# Altium PCB TIDA_010057.PcbDoc (part 8 of 9)
Units mil, origin at the board's own origin, x right, y up, seen from the top; angles counter-clockwise.
Board outline 1771.65 x 3543.31 mil, 12 copper layers (Top Layer, GND1, Signal Layer 1, GND2, POWER1, POWER2, GND4, POWER3, GND6, Signal Layer 2, GND7, Bottom Layer), stack 62.79 mil thick; 593 components, 374 nets, 1805 pads, 1029 vias.
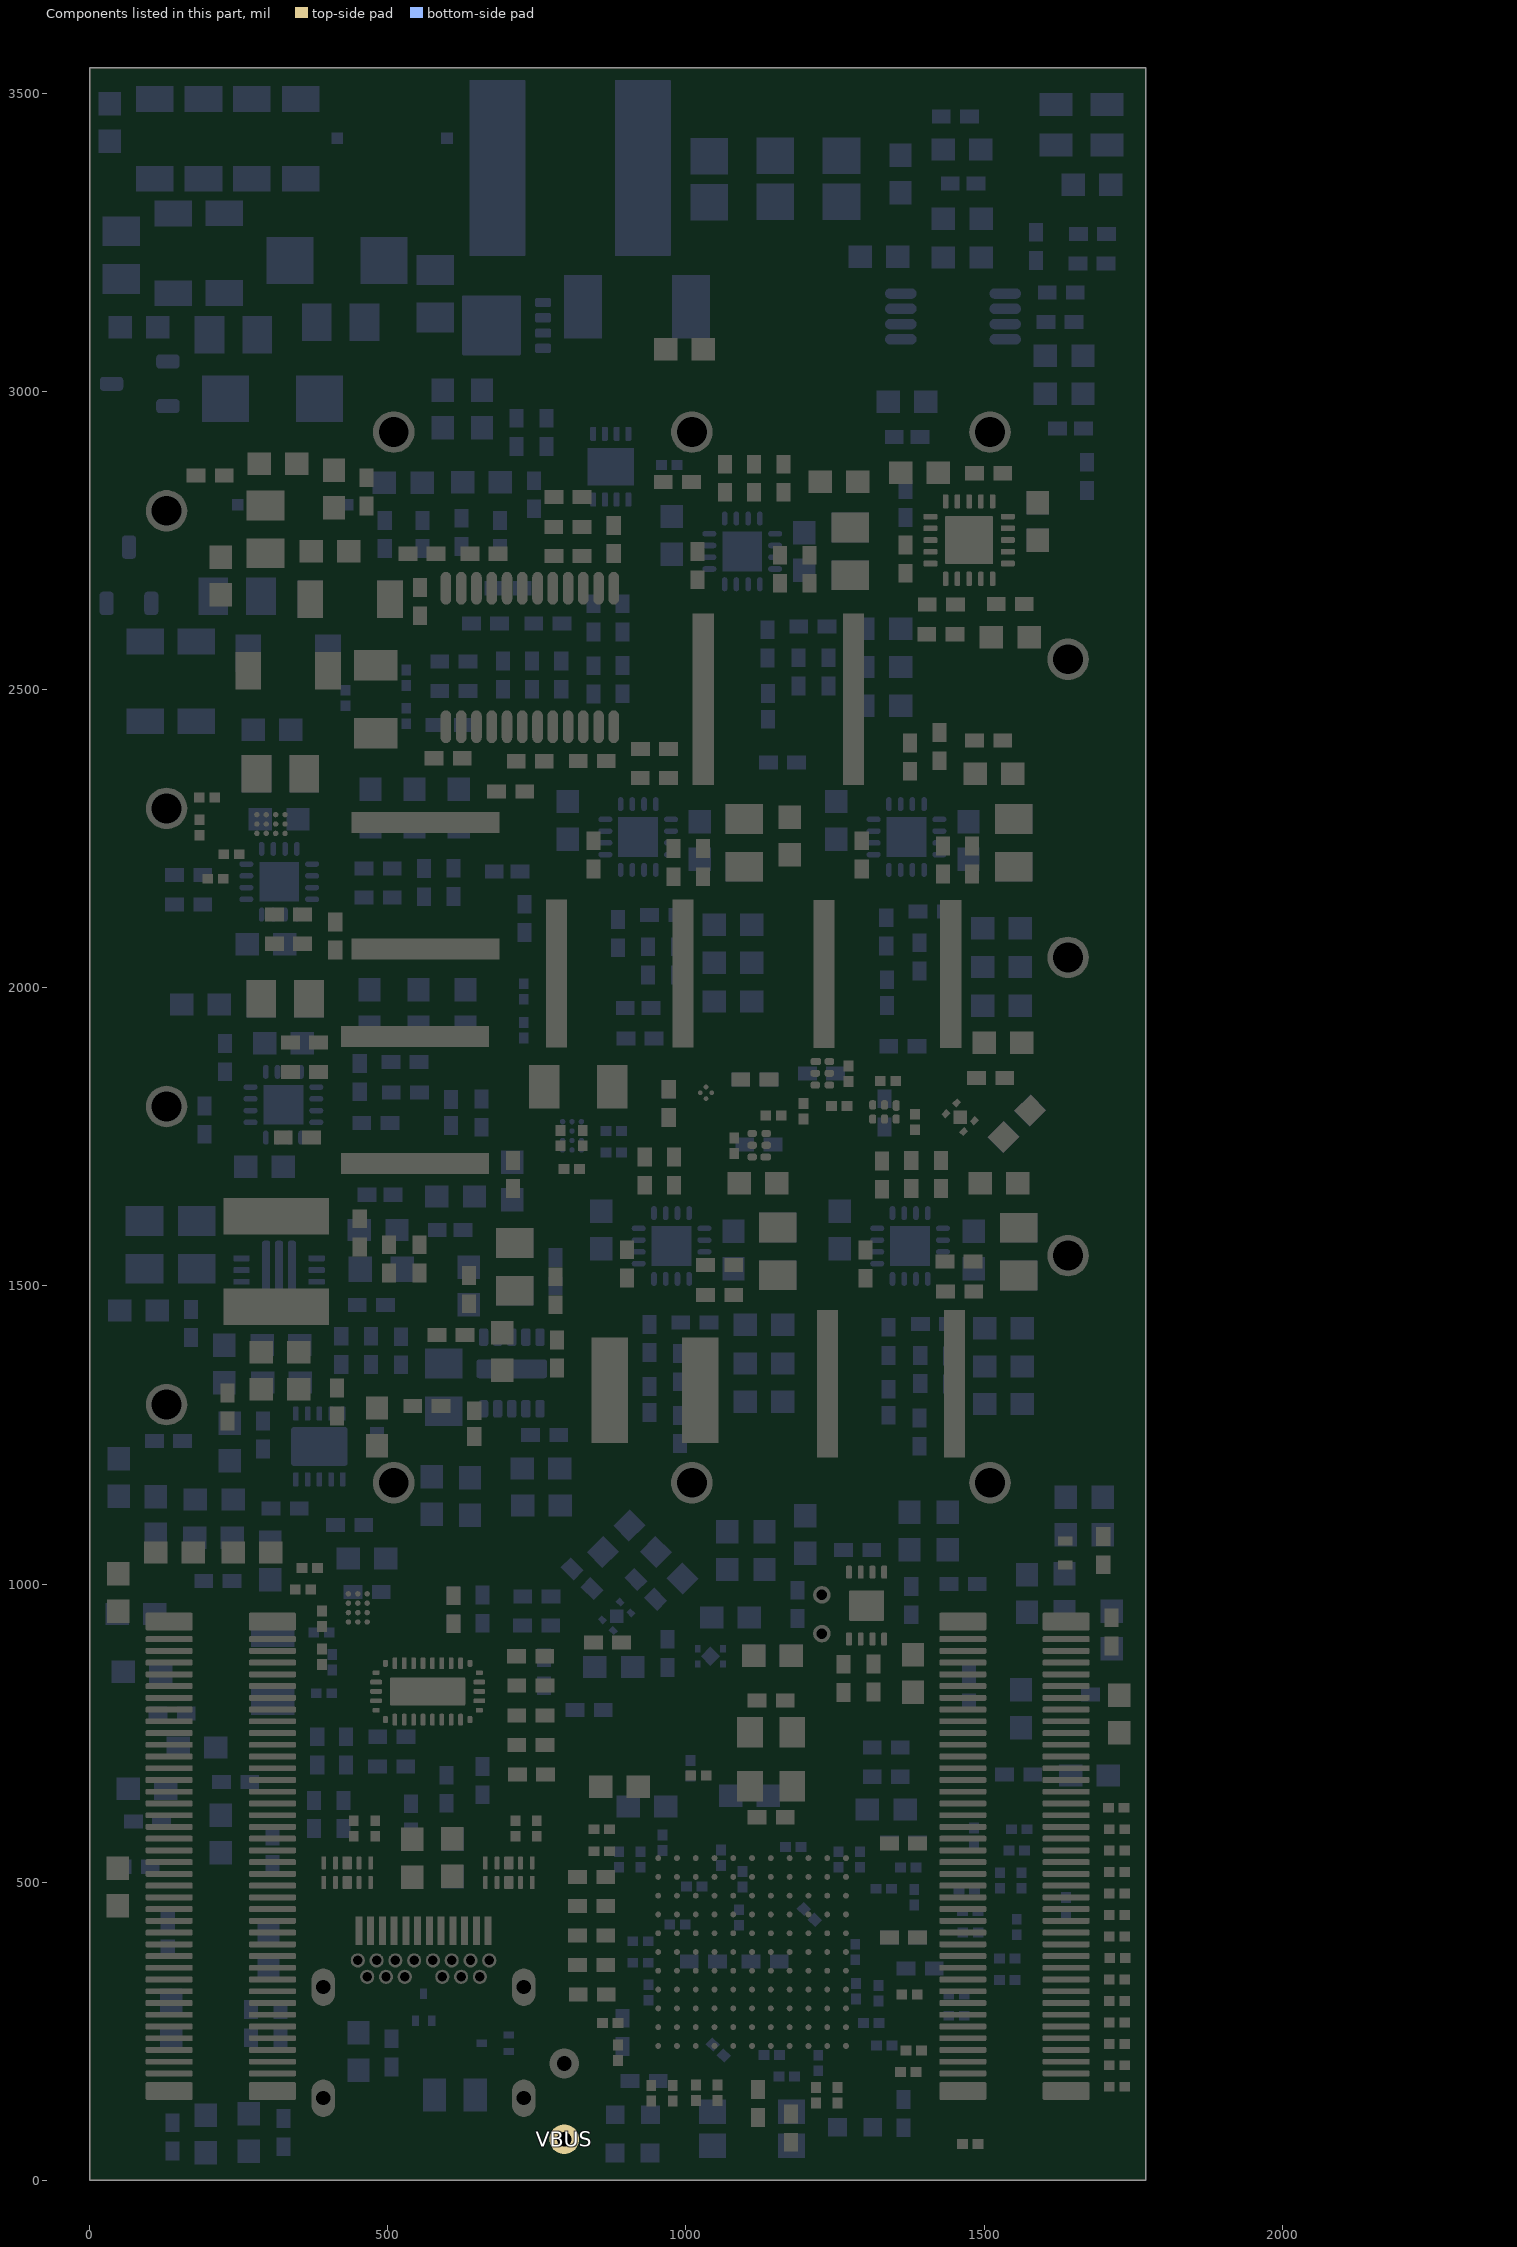
[diagram p16: the components of this part, seen from the top]

## Polygon pours and split planes (outlines as drawn) (continued)
NetC188_2 on Top Layer "Top Layer-No Net" (solid, remove dead copper, pour order 1956): 657,1280 657,1329 664,1336 754,1336 760,1342 760,1376 756,1380 641,1380 627,1394 566,1394 561,1389 561,1372 573,1360 573,1287 580,1280
NetC187_1 on Top Layer "Top Layer-No Net" (solid, remove dead copper, pour order 1972): 27 vertices, not listed, extent 614,1403 793,1531
GND_SIG on Top Layer "Top Layer-No Net" (solid, remove dead copper, pour order 2070): 1739,1073 1770,1042 1770,53 1722,5 46,5 4,47 4,1031 46,1073
GND_SIG on Bottom Layer "Top Layer-No Net" (solid, remove dead copper, pour order 2084): 480,2754 701,2754 703,2752 703,2719 689,2705 480,2705 476,2709 476,2752
NetC35_1 on Bottom Layer "Top Layer-No Net" (solid, remove dead copper, pour order 1976): 367,2709 368,2708 455.86,2708 457,2709.14 457,2998 413.61,3041.39 413.61,3156.39 410,3160 339,3160 333,3154 333,2935 367,2901
HVGND on Bottom Layer "Top Layer-No Net" (solid, remove dead copper, pour order 1974): 479,3321 479,3528 18,3528 15,3525 15,3464 389,3464 402,3451 402,3321
HVP on Bottom Layer "Top Layer-No Net" (solid, remove dead copper, pour order 1966): 1431,954 1437,960 1467,960 1480,973 1549,973 1664,973 1666,971 1666,926 1661,921 1586.84,921 1578.84,929 1519,929 1511,921 1435,921 1431,925
PGND on Bottom Layer "Top Layer-No Net" (solid, remove dead copper, pour order 1910): 45 vertices, not listed, extent 295,1760 701,2022
NetC227_1 on Bottom Layer "Top Layer-No Net" (solid, remove dead copper, pour order 1908): 649,1954 654,1949 654,1899 653,1898 436,1898 435,1899 435,1948 441,1954
NetC79_1 on Bottom Layer "Top Layer-No Net" (solid, remove dead copper, pour order 1906): 280,1708 270,1718 270,1766 274,1770 276.44,1770 276.44,1779 251,1779 241,1769 241,1682 280,1682
NetC79_2 on Bottom Layer "Top Layer-No Net" (solid, remove dead copper, pour order 1904): 21 vertices, not listed, extent 291,1681 657,1759
PGND on Bottom Layer "Top Layer-No Net" (solid, remove dead copper, pour order 1898): 39 vertices, not listed, extent 286,2137 694.5,2392
NetC59_2 on Bottom Layer "Top Layer-No Net" (solid, remove dead copper, pour order 1890): 18 vertices, not listed, extent 288,2043 670.02,2134
PGND on Bottom Layer "Top Layer-No Net" (solid, remove dead copper, pour order 1868): 50 vertices, not listed, extent 1065.5,2372 1380.5,2763
NetC80_2 on Bottom Layer "Top Layer-No Net" (solid, remove dead copper, pour order 1866): 22 vertices, not listed, extent 937,2397.38 1092.19,2765
NetC96_1 on Bottom Layer "Top Layer-No Net" (solid, remove dead copper, pour order 1836): 210,393 200,403 186,417 186,443 201,458 311,458 319,450 319,393 279,393
NetC25_2 on Bottom Layer "Top Layer-No Net" (solid, remove dead copper, pour order 1558): 440,3051 434,3057 434,3152 440,3158 629,3158 637,3166 637,3523 731,3523 732,3522 732,3226 726,3220 726,3054 723,3051
HVGND on Bottom Layer "Top Layer-No Net" (solid, remove dead copper, pour order 1554): 19 vertices, not listed, extent 916.41,3015 1387,3346
GND_SIG on Bottom Layer "Bottom Layer-No Net 3" (solid, pour order 1522): 17 vertices, not listed, extent 86,514 184,680
PGND on Bottom Layer "Bottom Layer-No Net 1" (solid, remove dead copper, pour order 1518): 128,111 147,130 326,130 338,118 338,88 160,88 152,80 126,80 125,79 125,108
GND_SIG on Bottom Layer "Bottom Layer-No Net 1" (solid, remove dead copper, pour order 1516): 124,67 349,67 355,61 355,16 351,12 124,12 122,14 122,65
NetC198_1 on Bottom Layer "Bottom Layer-No Net 1" (solid, remove dead copper, pour order 1458): 92,27 98,33 98,136 156,194 156,258 118,258 118,236.73 34,152.73 34,38 45,27
1V2_DVDD on Bottom Layer "Bottom Layer-No Net 1" (solid, remove dead copper, pour order 1456): 69,338 73,334 89,334 94,329 94,297 109,282 118,282 170,282 173,285 173,382 151,404 71,404 69,402
NetC217_1 on Bottom Layer "Bottom Layer-No Net" (solid, remove dead copper, pour order 300): 28 vertices, not listed, extent 485,358.09 630,535
PGND on Bottom Layer "Bottom Layer-No Net" (solid, remove dead copper, pour order 38): 529,204 558.74,174.26 597.85,174.26 598.86,173.25 598.86,115.73 592.13,109.01 530,110 428,110 424,114 424,201 427,204 483,204
VBUS_USB on Bottom Layer "Top Layer-No Net" (solid, remove dead copper, pour order 390): 18 vertices, not listed, extent 185,890 382,952
VBUS on Bottom Layer "Top Layer-No Net" (solid, remove dead copper, pour order 394): 376.96,848.03 351.02,848.03 347.06,851.31 347.06,865.21 343.59,869 212,869 209,866 209,851 235.59,824.41 235.59,773.4 241.89,767.1 386.87,767.1 386.87,838.12
VBUS on Bottom Layer "Bottom Layer-No Net 1" (solid, remove dead copper, pour order 984): 827.01,896.01 842,911 853,911 869.01,894.99 869.01,841 867.01,839 829.01,839 827.01,841
VCC_3.3V_CDCE on Bottom Layer "Bottom Layer-No Net 1" (solid, remove dead copper, pour order 986): 20 vertices, not listed, extent 877,980 1017,1125.02
VCC_3.3V on Bottom Layer "Bottom Layer-No Net 1" (solid, remove dead copper, pour order 988): 852,1090 790.5,1028.5 811,1008 814,1008 845,1039 848,1039 860,1027 887.5,1054.5
VCC_INT_1V on Bottom Layer "Bottom Layer-No Net 1" (solid, remove dead copper, pour order 1408): 23 vertices, not listed, extent 100,471 347,570
VCCO_2V5 on Bottom Layer "Bottom Layer-No Net 1" (solid, remove dead copper, pour order 1416): 17 vertices, not listed, extent 191,611 342,745
1.8V_AVDD_VCA on Bottom Layer "Bottom Layer-No Net 1" (solid, remove dead copper, pour order 1440): 20 vertices, not listed, extent 1448,726 1678,819
1V8_VDD_RX on Bottom Layer "Bottom Layer-No Net 1" (solid, remove dead copper, pour order 1442): 1688,703.15 1744.85,703.15 1749,699 1749,664 1744,659 1688,659
1V8_AVDD_IO_TX on Bottom Layer "Bottom Layer-No Net 1" (solid, remove dead copper, pour order 1448): 211.24,779 203.24,771 146,771 146,822 135,833 101,833 99,835 99,872 153,872 215,810 215,782 212,779
VBUS_USB on Bottom Layer "Bottom Layer-No Net" (solid, remove dead copper, pour order 1510): 577,596.5 579.46,594.05 579.46,557.78 572.85,552 517,552 508,561 508,592 512.5,596.5
NetC39_2 on Bottom Layer "Top Layer-No Net" (solid, remove dead copper, pour order 1844): 1219,1212.97 1219.98,1211.99 1300,1211.98 1300,1484.35 1284,1500.35 1284,1544 1292,1552 1331,1552 1333,1554 1333,1600 1332,1601 1311,1601 1293,1583 1240,1583 1219,1562
PGND on Bottom Layer "Top Layer-No Net" (solid, remove dead copper, pour order 1846): 45 vertices, not listed, extent 1326,1235 1600,1599.62
NetC54_2 on Bottom Layer "Top Layer-No Net" (solid, remove dead copper, pour order 1848): 19 vertices, not listed, extent 819,1211.98 933,1600
PGND on Bottom Layer "Top Layer-No Net" (solid, remove dead copper, pour order 1850): 36 vertices, not listed, extent 927,1212 1187,1600
NetC102_2 on Bottom Layer "Top Layer-No Net" (solid, remove dead copper, pour order 1852): 1213,1899.97 1213.98,1898.99 1286,1898.98 1286,2179.35 1278,2187.35 1278,2231 1286,2239 1325,2239 1326,2240 1326,2285 1324,2287 1304,2287 1287,2270 1234,2270 1213,2249
PGND on Bottom Layer "Top Layer-No Net" (solid, remove dead copper, pour order 1854): 52 vertices, not listed, extent 1323,1767 1604,2285
NetC176_2 on Bottom Layer "Top Layer-No Net" (solid, remove dead copper, pour order 1858): 763,1899.97 763.98,1898.99 843,1898.98 843,2172.35 828,2187.35 828,2231 836,2239 875,2239 877,2241 877,2287 876,2288 855,2288 837,2270 784,2270 763,2249
PGND on Bottom Layer "Top Layer-No Net" (solid, remove dead copper, pour order 1860): 53 vertices, not listed, extent 874,1759 1170,2284
NetC117_1 on Bottom Layer "Top Layer-No Net" (solid, remove dead copper, pour order 1942): 18 vertices, not listed, extent 61,1422 267,1554
PGND on Bottom Layer "Top Layer-No Net" (solid, remove dead copper, pour order 1948): 334,1420 334,1456 345,1456 345,1424 348,1421 372,1421 373,1420 373,1319 334,1319
NetC181_1 on Bottom Layer "Top Layer-No Net" (solid, remove dead copper, pour order 1958): 420,1297 438,1315 521,1315 527,1309 527,1283.35 521.65,1278 434,1278 430,1274 421,1274 420,1275
"ALTERNATE HV INPUT" on Bottom Layer "Top Layer-No Net" (solid, remove dead copper, pour order 1960): 370,1298 311,1298 303,1290 216,1290 214,1288 214,1251 216,1249 259,1249 268,1258 305,1258 321,1274 370,1274
PGND on Bottom Layer "Top Layer-No Net" (solid, remove dead copper, pour order 1964): 35 vertices, not listed, extent 91,1059 657,1315
NetC129_1 on Bottom Layer "NONET_L-01_P-001" (solid, remove dead copper, pour order 328): 370,380 740,380 750,370 750,80 740,70 370,70 360,80 360,370
GND_SIG on Bottom Layer "Top Layer-No Net" (solid, remove dead copper, pour order 2072): 1739,1073 1770,1042 1770,53 1722,5 46,5 4,47 4,1031 46,1073
GND_A7 on GND1 "Top Layer-No Net" (solid, remove dead copper, pour order 2042): 174,1318.16 181.16,1311 209,1311 213,1315 213,1357.16 222.84,1367 392,1367 402,1357 534,1357 552,1375 552,1615 544,1623 225,1623 174,1572
TX_5V on GND1 "Top Layer-No Net" (solid, remove dead copper, pour order 2038): 370,1016 356,1030 237,1030 228,1021 228,713 239,702 360,702 370,712
TX_-5V on GND1 "Top Layer-No Net" (solid, remove dead copper, pour order 2040): 18 vertices, not listed, extent 15,771 505,1155
GND_SIG on GND1 "Top Layer-No Net" (solid, remove dead copper, pour order 2054): 1716,3543 1771,3488 1771,60 1711,0 76,0 0,76 0,3489 54,3543
NetC96_1 on POWER1 "Top Layer-No Net" (solid, remove dead copper, pour order 1982): 1143,1287 1172,1258 1172,1081.61 1152.39,1062 1065,1062 1055,1072 1055,1221 1015,1261 1015,1434 1029,1448 1138,1448 1143,1443
NetC46_1 on POWER1 "Top Layer-No Net" (solid, remove dead copper, pour order 1980): 1554,1141 1571,1124 1737,1124 1754,1141 1754,1452 1741,1465 1467,1465 1460,1458 1460,1220 1465,1215 1533,1215 1554,1194
VBUS on POWER1 "Top Layer-No Net" (solid, remove dead copper, pour order 1990): 53 vertices, not listed, extent 208.7,416 1770.37,3338
VBUS_USB on POWER1 "Bottom Layer-No Net 1" (solid, remove dead copper, pour order 1992): 22 vertices, not listed, extent 10,5 981,1256
VCC_FX3_AVDD on POWER1 "Top Layer-No Net" (solid, remove dead copper, pour order 1994): 30 vertices, not listed, extent 1126,147 1657,1103
VCC_FX3_TXVDDQ on POWER1 "Top Layer-No Net" (solid, remove dead copper, pour order 1996): 31 vertices, not listed, extent 994,11 1756,1104
VTX_5V on POWER1 "Top Layer-No Net" (solid, remove dead copper, pour order 2008): 22 vertices, not listed, extent 0,1272 1660,3530.48
NetL43_1 on POWER2 "Top Layer-No Net" (solid, remove dead copper, pour order 2010): 27,1048 16,1059 16,2744 20,2748 86,2748 93,2741 93,1275 133,1235 133,1057 124,1048
VDD_FPGA on POWER2 "Top Layer-No Net" (solid, remove dead copper, pour order 2014): 21 vertices, not listed, extent 130,1272 1184,2664
NetC227_1 on POWER2 "Top Layer-No Net" (solid, remove dead copper, pour order 2016): 200,772 200,801 229.03,830.03 253,830.03 253,1907 296,1950 653,1950 713,1890 713,583 657,527 205,527 176,556 176,748
3.3V on POWER2 "Top Layer-No Net" (solid, remove dead copper, pour order 2018): 21 vertices, not listed, extent 1470,684 1756.36,1774
1V8_VDD_RX on POWER2 "Top Layer-No Net" (solid, remove dead copper, pour order 2020): 53 vertices, not listed, extent 8,3 1755,2580
VCC_FX3_VIO on POWER2 "Top Layer-No Net" (solid, remove dead copper, pour order 2022): 988,122 948,162 842,162 811,193 811,196 811,1040 811.8,1040.8 811.8,1209.8 847,1245 1274,1245 1286,1233 1286,608 1394,500 1394,207 1309,122
PGND on POWER2 "Top Layer-No Net" (solid, remove dead copper, pour order 2080): 1716,3543 1771,3488 1771,60 1711,0 76,0 0,76 0,3489 54,3543
PGND on POWER3 "Top Layer-No Net" (solid, remove dead copper, pour order 2096): 1716,3543 1771,3488 1771,60 1711,0 76,0 0,76 0,3489 54,3543
VCC_FX3_RXVDDQ on POWER3 "Top Layer-No Net" (solid, remove dead copper, pour order 2028): 22 vertices, not listed, extent 902,482 1396,1102
VCC_FX3_CVDDQ on POWER3 "Top Layer-No Net" (solid, remove dead copper, pour order 2030): 33 vertices, not listed, extent 799,0 1299,1047
NetC96_1 on POWER3 "Top Layer-No Net" (solid, remove dead copper, pour order 2034): 24 vertices, not listed, extent 176,75 1189,1460
NetC198_1 on POWER3 "Top Layer-No Net" (solid, remove dead copper, pour order 2044): 26 vertices, not listed, extent 19,15 1132,1887
NetC83_1 on POWER3 "Top Layer-No Net" (solid, remove dead copper, pour order 2046): 1375,2444 1397,2466 1397,2588 1600,2791 1612,2803 1612,2841.54 1606.54,2847 1348,2847 1205,2704 1205,2461 1222,2444
NetC61_1 on POWER3 "Top Layer-No Net" (solid, remove dead copper, pour order 2036): 632,2315 89,2315 15,2241 15,726 34,707 306,707 334,735 334,2020 388,2074 633,2074 655,2096 655,2292
VCC_FX3_DVDD on POWER3 "Top Layer-No Net" (solid, remove dead copper, pour order 2032): 36 vertices, not listed, extent 925,13 1751,1100
NetL42_1 on POWER3 "Top Layer-No Net" (solid, remove dead copper, pour order 2024): 22 vertices, not listed, extent 12.67,986 1757,3191
"ALTERNATE HV INPUT" on GND2 "Top Layer-No Net" (solid, remove dead copper, pour order 2050): 17 vertices, not listed, extent 194,1176 1741,3524
AVSS on GND2 "Top Layer-No Net" (solid, remove dead copper, pour order 2052): 313,564 339.27,590.27 397.38,590.27 423.65,564 1682,564 1756,638 1756,1054 1719,1091 56,1091 14,1049 14,583 33,564
PGND on GND2 "Top Layer-No Net" (solid, remove dead copper, pour order 2062): 1716,3543 1771,3488 1771,60 1711,0 76,0 0,76 0,3489 54,3543
PGND on GND4 "Top Layer-No Net" (solid, remove dead copper, pour order 2098): 646,2896 587,2837 587,268 613,242 706,242 726,222 726,33 759,0 792,0 1711,0 1771,60 1771,2896
HVGND on GND4 "Top Layer-No Net" (solid, remove dead copper, pour order 2088): 21 vertices, not listed, extent 0,16 1769,3530
PGND on GND6 "Top Layer-No Net" (solid, remove dead copper, pour order 2064): 1716,3543 1771,3488 1771,60 1711,0 76,0 0,76 0,3489 54,3543
GND_SIG on GND7 "Top Layer-No Net" (solid, remove dead copper, pour order 2056): 0,3506 36,3542 1732,3542 1772,3502 1771,2939 1771,2885 1771,60 1711,0 76,0 0,76
GND_SIG on Signal Layer 1 "Top Layer-No Net" (solid, remove dead copper, pour order 2094): 1716,3543 1771,3488 1771,60 1711,0 76,0 0,76 0,3489 54,3543
GND_SIG on Signal Layer 2 "Top Layer-No Net" (solid, remove dead copper, pour order 2074): 1716,3543 1771,3488 1771,60 1711,0 76,0 0,76 0,3489 54,3543

## Keep-outs
Keep-Out Layer:
  the board outline again, w10

## Other copper
Top Layer:
  region net NetC72_1: 252,2742 264,2754 327,2754 327,2704 325,2702 202,2702 180,2724 180,2822 183,2825 206,2825 209,2822 209,2750 217,2742
  region net PGND: 194,2871 155,2871 150,2876 114,2876 107,2869 107,2786 108,2787 147,2787 150,2790 150,2838 159,2847 194,2847
  region net PGND: 331,2898 398,2898 404,2904 404,2956.19 414.81,2967 530,2967 546,2951 546,2904 518,2876 481.86,2876 474,2868.14 474,2840 451,2840 443,2848 387,2848 375,2860 331,2860
  region net "ALTERNATE HV INPUT": 599,1406 599,1464 578,1485 536,1485 528,1477 528,1443 565,1406
  region net NetC36_2: 245,2590 250,2595 284,2595 288,2591 288,2500 245,2500
  region net HVGND: 307,2899 304,2902 179,2902 174,2897 174,2885 178,2881 205,2881 209,2877 209,2853 215,2847 250,2847 263,2834 263,2783 329,2783 338,2774 397,2774 414,2757 414,2623 378,2587 378,2501 422,2501 422,2575 436,2589 505,2589 525,2609 525,2612 525,2684 499,2710 499,2812.73 488.73,2823 420,2823 417,2826 343,2826 335,2834 321,2834 309,2846 309,2897
  pour cut-out: 1205,127 1197,119 1196.48,119 1192,123.48 1192,127.14 1192,159 1205,172
  region net TX_-5V: 427,1057 432,1057 443,1046 443,1037 434,1028 423,1028 416,1035 416,1046
  region net VBUS: 220,865 247,865 252,860 252,843 248,839 223,839 214,848 214,862
  region net VDD_FPGA: 350,2460 327,2437 327,2430 349,2408 358,2408 364,2414 364,2454 358,2460
  pour cut-out: 1251.55,889.53 1251.55,891.27 1242.13,900.69 1233.37,891.93 1233.37,891.28 1235.27,891.28 1246.44,880.12 1251.44,885.12 1251.44,889.76
  pour cut-out: 502,848 630,848 635,843 635,795 629,789 502.69,789 495.53,796.16 495.53,842.53 500,847
  region net NetC227_1: 421.98,1936.02 434.97,1949 660,1949 670.02,1938.98 670.02,1849.41 670.01,1849.4 421.98,1849.4
  region net VBUS_USB: 520,606 558.27,606 563,601.27 563,555 560,552 522,552 517.35,556.65 517.35,603.35
  region net VCC_FX3_AVDD: 1633,1103 1654,1082 1654,1070 1648,1064 1623,1064 1619,1068 1619,1097 1625,1103
  region net VCC_FX3_TXVDDQ: 1679,1103 1717,1103 1719,1101 1719,1064 1718,1063 1679,1063 1678,1064 1678,1102
  region net VBUS: 443,2401 517,2401 517,2453 443,2453
  region net VTX_5V: 444,2567 443,2566 443,2515 517,2515 517,2567
  region net VBUS: 818,1753 818,1770 846,1770 846,1753
  region net AVSS: 97,794 171,794 173,792 173,767 171,765 76,765 71,770 71,788 77,794
  region net PGND: 1358,2762 1347,2773 1347,2837 1356,2846 1379,2846 1379,2882 1380,2883 1340,2883 1326,2869 1326,2757 1357,2726 1432,2726 1451,2707 1451,2664 1442,2655 1437,2655 1437,2631 1465,2631 1466,2632 1466,2652 1460,2658 1460,2708 1463,2711 1509,2711 1526,2728 1556,2728 1564,2720 1564,2667 1552,2655 1552,2611 1555,2608 1555,2570 1556,2569 1598,2569 1610,2581 1610,2771 1555,2771 1552,2774 1519,2774 1512,2781 1442,2781 1436,2775 1392.79,2775 1379.79,2762
  region net 1V8_VDD_RX: 1532,2550 1537,2545 1560,2545 1565,2540 1565,2507 1560,2502 1529,2502 1494,2502 1492,2504 1492,2653 1470,2675 1470,2697 1471,2698 1524,2698 1528,2702 1528,2715 1529,2716 1551,2716 1552,2715 1552,2679 1536,2663 1536,2611 1532,2607
  region net NetC83_1: 1470,2828 1545,2828 1552,2835 1609,2835 1609,2793 1560,2793 1552,2785 1530,2785 1528,2787 1528,2797 1521,2804 1470,2804
  region net NetC83_1: 1319.5,2340 1195.01,2340 1194.99,2629 1309,2629 1319.5,2618.5
  region net VBUS: 1245.5,2868 1192.5,2868 1189.5,2865 1189.5,2832 1191.5,2830 1245.5,2830
  region net NetC81_1: 1268.01,2821.5 1268.01,2868 1307.51,2868 1307.51,2747 1243.51,2747 1243.51,2797
  region net VCCO_2V5: 345,637.35 346,636.35 346,609 345,608 259,608 257,610 257,634.35 260,637.35
  region net 1V8_DVDD: 73,637 172,637 173,636 173,608.31 73,607.97
  region: 2310,15
  region: 2310,15
  region: 2310,15
  region: 2310,15
  region: 2310,15
  region: 2310,15
  region: 605.6,3319.76
  region: 605.6,3319.76
  region: 605.6,3319.76
  region net GND_SIG: 94.07,671.37 172.34,671.37 172.69,671.03 172.69,652.24 172.64,652.28 94.08,652.28 94.08,671.26 94.04,671.3
  region net GND_SIG: 267.3,671.37 345.57,671.37 345.92,671.03 345.92,652.24 345.87,652.28 267.31,652.28 267.31,671.26 267.27,671.3
  region net NetC41_1: 1526,1622.5 1536,1632.5 1536,1691.5 1537,1692.5 1576,1692.5 1577,1691.5 1577,1635.5 1590,1622.5 1590,1572.5 1526,1572.5
  region net VBUS: 1514,1691.5 1461,1691.5 1458,1688.5 1458,1655.5 1460,1653.5 1514,1653.5
  region net NetC46_1: 1381.41,1460.01 1505.99,1460.01 1521,1445 1521,1251 1481.98,1211.98 1381.41,1211.98
  region net NetC56_1: 1122,1622.5 1132,1632.5 1132,1691.5 1133,1692.5 1172,1692.5 1173,1691.5 1173,1635.5 1186,1622.5 1186,1572.5 1122,1572.5
  region net VDD_FPGA: 1110,1691.5 1057,1691.5 1054,1688.5 1054,1655.5 1056,1653.5 1110,1653.5
  region net NetC54_2: 902,1432 904,1430 904,1214 903,1213 838,1213 837,1214 837,1429 840,1432
  region net NetC96_1: 992,1432 1008,1448 1096,1448 1122,1422 1122,1276 1079,1233 992,1233 991,1234 991,1431
  region net NetC103_1: 1518,2308 1528,2318 1528,2377 1529,2378 1568,2378 1569,2377 1569,2321 1582,2308 1582,2258 1518,2258
  region net VBUS: 1506,2378 1453,2378 1450,2375 1450,2342 1452,2340 1506,2340
  region net NetC110_1: 1442,1782 1438,1778 1388,1827.89 1388,1872 1375.41,1884.59 1375.41,1898.98 1375.4,2147.02 1508.98,2147.02 1516,2140 1516,1933 1517.7,1931.3 1520,1929 1520,1889 1519,1888 1513,1888 1505,1880 1505,1839 1503,1837 1446.59,1837 1434,1824.41 1434,1799.65 1442,1791.65
  region net 3.3V: 1454,1766 1467.53,1766 1475.53,1758 1515,1758 1533,1776 1534,1776 1565,1745 1565,1732 1544,1711 1459,1711 1451,1719 1451,1763
  region net NetC132_1: 1072,1911 1062,1901 1014.03,1901 1012,1898.97 1012,1840 1038,1814 1038,1813 1035,1810 1028,1810 1024,1814 959,1814 958,1815 958,1868.4 926.41,1899.98 926.4,2148.02 1013.98,2148.02 1072,2090
  region net NetC196_1: 1066.5,2308 1191,2308 1193,2306 1193,2266 1192,2265 1132,2265 1131,2264 1131,2259 1130,2258 1066.5,2258
  region net VBUS: 1155,2243.5 1155,2190.5 1158,2187.5 1191,2187.5 1193,2189.5 1193,2243.5
  region net NetC198_1: 1106,1874 1108,1872 1108,1834 1038,1834 1035,1831 1032,1831 1029,1834 1029,1868 1035,1874
  region net NetL43_1: 23,1106 28,1111 66,1111 70,1107 70,998 27,998 23,1002
  region net AVSS: 267,872 348,872 348,848.66 267,848.66
  region net AVSS: 199,870 199,877 196,880 187,880 180,873 94,873 94,844 186,844 199,857
  region net AVSS: 259,795 244,780 244,774 253,765 346,765 346,795
  region net AVSS: 1508,862.25 1517.25,853 1591,853 1606,868 1650,868 1653,865 1653,832 1646,825 1498,825 1426,825 1425,826 1425,871 1427,873 1507,873 1508,872
  region net AVSS: 1677.08,826.31 1677.08,871.31 1676.08,872.31 1598.31,872.31 1596,870 1596,832 1601.69,826.31
  region net GND_SIG: 1729,974 1732,971 1732,932 1728,928 1696,928 1692,932 1692,971 1695,974
  region net GND_SIG: 483.03,962.97 474,972 464,972 462,970 462,952 465,949 466,949 473,949 477.97,953.97 479.52,953.97 483.03,957.48
  region net NetC120_1: 263,1394 217,1348 217,1307 219,1305 306,1305 308,1307 308,1408 265,1408 263,1406
  region net NetC181_1: 463,1315 554,1315 558,1311 558,1279 554,1275 463,1275
  region net "ALTERNATE HV INPUT": 219,1290 299,1290 302,1287 302,1261 298,1257 219,1257
  region net TX_-5V: 172,834 93,834 91,832 91,807.65 94,804.65 171.65,804.65 172,805
  region net 1V8_AVDD_IO_TX: 263.74,834 257.74,828 202,828 192,818 192,786 199,779 222,779 247,804 345,804 345,834
  region net TX_5V: 94,755 345,755 346,754 346,707 345,706 94,706
  region net 3.3V_AVDD: 1425,815 1688,815 1707,834 1746,834 1746,794.5 1709.5,794.5 1700,785 1425,785
  region net NetC208_2: 239,2679 172,2679 168,2675 168,2641 171,2638 239,2638
  region net NetC36_2: 351,2752 390,2752 393,2749 393,2621 348,2621 348,2749
  region net GND_SIG: 1337,1031 1337,943 1332,938 1319,938 1318,937 1318,897 1308,897 1308,935 1305,938 1273,938 1268,943 1268,1031
  region net PGND: 1042,1828 1041,1827 1041,1822 1048,1815 1048,1808 1039,1799 958,1799 956,1797 956,1769 958,1767 1058,1767 1065,1774 1065,1823 1060,1828
  region net PGND: 320,1698 306,1684 306,1681 344,1681 344,1683 329,1698
  pour cut-out: 182,692 251.12,692 257.51,685.61 257.51,529.97 248.54,521 203,521 182.45,541.55 182.45,685.61
  pour cut-out: 988.95,676.76 983.36,676.76 981.87,675.26 981.87,663.12 989.25,655.73 993.78,660.26 993.78,660.74 988.95,665.58
  text "'.Layer_Name'" at 612,-857 h60
GND1:
  pour cut-out: 1398.07,453.76 1389.24,444.93 1393.93,440.24 1394.93,440.24 1403.76,449.07
  pour cut-out: 1569.87,608.13 1566.32,604.59 1560.36,604.59 1560.36,598.08 1561.51,596.93 1567.1,596.93 1571.57,601.4
  pour cut-out: 471,613 470,612 470,568 471,567 487,567 488,568 488,612 487,613
  pour cut-out: 434,568 435,567 450,567 451,568 451,612 450,613 435,613 434,612
  pour cut-out: 706,613 705,612 705,568 706,567 722,567 723,568 723,612 722,613
  pour cut-out: 741,612 742,613 758,613 759,612 759,568 758,567 742,567 741,568
  pour cut-out: 15.29,907 15,901 21,907 24,907 85,907 92,914 92,1125 72,1145 25,1145 14.75,1155.25
  pour cut-out: 1414,958 1418,962 1503,962 1509,956 1509,909 1504,904 1423,904 1414,913
  pour cut-out: 1583,958 1587,962 1672,962 1678,956 1678,909 1673,904 1592,904 1583,913
  pour cut-out: 1528,1056 1528,1058 1538,1068 1606.46,1068 1613,1061.46 1613,994 1603,984 1537,984 1528,993
  pour cut-out: 229,167 234,172 239.85,166.15 239.85,164.02 235.07,159.24 227.31,167
  pour cut-out: 1201,276 1210,276 1210,266 1201,266
  text "'.Layer_Name'" at 605,-859 h60
Signal Layer 1:
  region net NetC164_1: 1129,925 1096,892 1096,884 1118,862 1129,862 1142,875 1142,919.7 1136.7,925
  pour cut-out: 15.29,907 15,901 21,907 24,907 85,907 92,914 92,1125 72,1145 25,1145 14.75,1155.25
  pour cut-out: 1528,1056 1528,1058 1538,1068 1606.46,1068 1613,1061.46 1613,994 1603,984 1537,984 1528,993
  pour cut-out: 1583,958 1587,962 1672,962 1678,956 1678,909 1673,904 1592,904 1583,913
  pour cut-out: 1414,958 1418,962 1503,962 1509,956 1509,909 1504,904 1423,904 1414,913
  pour cut-out: 1000.5,291.25 1005.62,291.25 1007.06,292.69 1009.51,290.24 1009.51,281.51 1004.23,281.51 999.76,285.97 999.76,290.51 1001.47,292.22 1005.37,292.22
  text "'.Layer_Name'" at 586,-859 h60
GND2:
  pour cut-out: 1514.42,331.2 1514.04,331.2 1509.98,327.13 1514.59,322.52 1514.59,321.8 1514.96,321.8 1519.03,325.87
  pour cut-out: 1398.07,453.76 1389.24,444.93 1393.93,440.24 1394.93,440.24 1403.76,449.07
  pour cut-out: 1569.87,608.13 1566.19,604.46 1561,604.46 1561,597.44 1561.51,596.93 1566.39,596.93 1571,601.54
  pour cut-out: 240.76,163.93 231.93,172.76 227.24,168.07 226.24,168.07 235.07,159.24 236.07,159.24
  pour cut-out: 14.29,901.3 14,895.3 20,901.3 23,901.3 84,901.3 91,908.3 91,1119.3 71,1139.3 24,1139.3 13.75,1149.55
  pour cut-out: 1528,1056 1528,1058 1538,1068 1606.46,1068 1613,1061.46 1613,994 1603,984 1537,984 1528,993
  pour cut-out: 1583,958 1587,962 1672,962 1678,956 1678,909 1673,904 1592,904 1583,913
  pour cut-out: 1414,958 1418,962 1503,962 1509,956 1509,909 1504,904 1423,904 1414,913
  text "'.Layer_Name'" at 586,-864 h60
POWER1:
  pour cut-out: 240.76,163.93 231.77,172.91 231.77,173.54 226.31,168.07 226.24,168.07 235.17,159.14 235.17,158.45 235.28,158.45
  pour cut-out: 1533,3262 1535.23,3259.77 1548.83,3259.77 1549,3259.6 1549,3253 1533,3253
  pour cut-out: 1211,3339 1221,3339 1221,3332 1211,3332
  pour cut-out: 1091,3339 1103,3339 1103,3331 1091,3331
  pour cut-out: 1201,278 1210,278 1210,268 1201,268
  pour cut-out: 1265.5,247 1274.5,247 1274.5,237 1265.5,237
  pour cut-out: 1265.5,309.99 1274.5,309.99 1274.5,299.99 1265.5,299.99
  pour cut-out: 1265.5,341.49 1274.5,341.49 1274.5,331.49 1265.5,331.49
  pour cut-out: 1259,115 1259,106 1249,106 1249,115
  pour cut-out: 1509.03,320.72 1509.03,329.72 1519.03,329.72 1519.03,320.72
  pour cut-out: 1199.01,175.5 1199.01,184.5 1209.01,184.5 1209.01,175.5
  pour cut-out: 1509.01,322.5 1509.01,331.5 1519.01,331.5 1519.01,322.5
  pour cut-out: 15.29,907 15,901 21,907 24,907 85,907 92,914 92,1125 72,1145 25,1145 14.75,1155.25
  pour cut-out: 1528,1056 1528,1058 1538,1068 1606.46,1068 1613,1061.46 1613,994 1603,984 1537,984 1528,993
  pour cut-out: 1583,958 1587,962 1672,962 1678,956 1678,909 1673,904 1605,904 1583,926
  pour cut-out: 1414,958 1418,962 1503,962 1509,956 1509,926 1487,904 1423,904 1414,913
  text "'.Layer_Name'" at 575,-857 h60
POWER2:
  pour cut-out: 1514.42,331.2 1510.35,327.13 1509.98,327.13 1509.98,326.41 1514.59,321.8
  pour cut-out: 1382.76,549.93 1373.93,558.76 1372.35,558.76 1368.74,555.14 1378.1,545.78 1378.43,545.78
  pour cut-out: 1569.87,608.13 1564.67,608.13 1561,604.46 1561,599 1562.13,597.87 1568.86,597.87 1572.29,601.3
  pour cut-out: 240.76,163.93 231.93,172.76 230.93,172.76 226.24,168.07 235.07,159.24
  pour cut-out: 1528,1056 1528,1058 1538,1068 1606.46,1068 1613,1061.46 1613,994 1603,984 1537,984 1528,993
  pour cut-out: 1583,958 1587,962 1660,962 1672,950 1672,916 1660,904 1592,904 1583,913
  pour cut-out: 1414,958 1418,962 1503,962 1509,956 1509,909 1504,904 1423,904 1414,913
  text "'.Layer_Name'" at 575,-862 h60
GND4:
  pour cut-out: 1514.42,331.2 1510.84,327.62 1509.27,327.62 1509.27,327.12 1514.59,321.8 1518.38,325.59 1519.48,325.59 1519.48,326.14
  pour cut-out: 1403.76,449.07 1399.07,453.76 1398.07,453.76 1389.24,444.93 1393.93,440.24 1394.93,440.24
  pour cut-out: 1569.87,608.13 1566.19,604.46 1561,604.46 1561,597.44 1561.51,596.93 1566.39,596.93 1571,601.54
  pour cut-out: 240.76,163.93 231.93,172.76 226.81,167.64 226.72,167.64 226.72,167.6 235.07,159.24 239.76,163.93
  pour cut-out: 1528,1056 1528,1058 1538,1068 1606.46,1068 1613,1061.46 1613,994 1603,984 1537,984 1528,993
  pour cut-out: 1583,958 1587,962 1672,962 1678,956 1678,909 1673,904 1592,904 1583,913
  pour cut-out: 1414,958 1418,962 1503,962 1509,956 1509,909 1504,904 1423,904 1414,913
  text "'.Layer_Name'" at 570,-857 h60
Signal Layer 2:
  region net "GLOBAL ENABLE": 1448.9,1642.34 1448.9,1630.15 1454.98,1636.23 1454.98,1636.66 1454.82,1636.66 1449.05,1642.43
  region net I2C_1V8: 818.8,940.33 797.56,940.33 796.8,939.57 796.8,914.24 802.43,908.62 809.08,908.62 818.68,918.21 818.68,940.6
  region net VDD: 724,2924 724,2918 747,2895 754,2895 778,2919 776,2921 776,2924
  region net I2C_1V8: 176,2352 183,2359 191,2359 194,2356 194,2342 189,2337 179,2337 176,2340
  region net VCC_3.3V_CDCE: 1019,1089 997,1089 990,1096 979,1096 971,1088 971,1075 999,1047 1011,1047 1029,1065 1029,1079
  pour cut-out: 15.29,907 15,901 21,907 24,907 85,907 92,914 92,1125 72,1145 25,1145 14.75,1155.25
  pour cut-out: 1528,1056 1528,1058 1538,1068 1606.46,1068 1613,1061.46 1613,994 1603,984 1537,984 1528,993
  pour cut-out: 1583,958 1587,962 1672,962 1678,956 1678,909 1673,904 1592,904 1583,913
  pour cut-out: 1414,958 1418,962 1503,962 1509,956 1509,909 1504,904 1423,904 1414,913
  pour cut-out: 955,511 955,513 955,505 957,503 969,503 973,507 973,516 970,519 958,519 955,516 955,509
  pour cut-out: 1749,456 1750,455 1750,429 1749,428 1749,392 1745.75,388.75 1732.25,388.75 1724,397 1724,453 1727,456
  text "'.Layer_Name'" at 570,-859 h60
GND6:
  pour cut-out: 1514.42,331.2 1510.35,327.13 1509.98,327.13 1509.98,326.41 1514.59,321.8 1518.66,325.87 1519.03,325.87
  pour cut-out: 1403.76,449.07 1398.31,454.52 1398.31,454.95 1389.24,445.89 1389.24,444.93 1393.93,440.24 1394.93,440.24
  pour cut-out: 1569.87,608.13 1564.67,608.13 1561,604.46 1561.51,603.95 1561.51,596.93 1566.39,596.93 1571,601.54
  pour cut-out: 240.76,163.93 231.93,172.76 227.24,168.07 226.24,168.07 235.07,159.24
  pour cut-out: 1458,100 1469,100 1469,91 1458,91
  pour cut-out: 1553,545 1564,545 1564,528 1553,528
  pour cut-out: 1556.76,302.94 1569.24,302.94 1570,302.19 1570,296 1558.82,296 1556.76,298.06
  pour cut-out: 15.29,907 15,901 21,907 24,907 85,907 92,914 92,1125 72,1145 25,1145 14.75,1155.25
  pour cut-out: 1528,1056 1528,1058 1538,1068 1606.46,1068 1613,1061.46 1613,994 1603,984 1537,984 1528,993
  pour cut-out: 1583,958 1587,962 1672,962 1678,956 1678,909 1673,904 1592,904 1583,913
  pour cut-out: 1414,958 1418,962 1503,962 1509,956 1509,909 1504,904 1423,904 1414,913
  text "'.Layer_Name'" at 593,-868 h60
GND7:
  pour cut-out: 1403.76,449.07 1399.07,453.76 1398.07,453.76 1389.24,444.93 1393.93,440.24 1394.93,440.24
  pour cut-out: 1569.87,608.13 1564.67,608.13 1561,604.46 1561.97,603.49 1561.97,596.9 1568.6,596.9 1572.75,601.05
  pour cut-out: 240.76,163.93 231.93,172.76 230.93,172.76 226.24,168.07 235.07,159.24
  pour cut-out: 15.29,907 15,901 21,907 24,907 85,907 92,914 92,1125 72,1145 25,1145 14.75,1155.25
  pour cut-out: 1528,1056 1528,1058 1538,1068 1606.46,1068 1613,1061.46 1613,994 1603,984 1537,984 1528,993
  pour cut-out: 1583,958 1587,962 1672,962 1678,956 1678,909 1673,904 1592,904 1583,913
  pour cut-out: 1414,958 1418,962 1503,962 1509,956 1509,909 1504,904 1423,904 1414,913
  text "'.Layer_Name'" at 577,-862 h60
POWER3:
  pour cut-out: 240.76,163.93 231.93,172.76 227.24,168.07 226.24,168.07 226.24,168 234.72,159.53 236.36,159.53
  pour cut-out: 1403.76,449.07 1399.07,453.76 1398.07,453.76 1389.24,444.93 1393.93,440.24 1394.93,440.24
  pour cut-out: 1569.87,608.13 1566.19,604.46 1561,604.46 1561,597.44 1561.51,596.93 1566.39,596.93 1571,601.54
  pour cut-out: 1551.19,1527.53 1551.19,1506.81 1554,1504 1562.02,1512.02 1562.02,1525.05 1552.7,1525.05 1549.69,1528.07
  pour cut-out: 92,1060 64,1032 64,984 92,956 92,943 92,914 85,907 24,907 21,907 15,901 15.29,907 14.75,1155.25 25,1145 72,1145 92,1125
  pour cut-out: 1201,278 1210,278 1210,267 1201,267
  pour cut-out: 213,2086 218,2081 218,2054 210,2046 171,2046 168,2049 168,2082 172,2086
  pour cut-out: 1507,327 1509,327 1516,334 1523,327 1523,325 1519.88,321.88 1512.12,321.88
  text "'.Layer_Name'" at 624,-865 h60